# Altium PCB 595数码管显示.PcbDoc
Units mm, origin at the board's own origin, x right, y up, seen from the top; angles counter-clockwise.
Board outline 152.4 x 101.6 mm, 2 copper layers (Top Layer, Bottom Layer); 31 components, 48 nets, 181 pads, 0 vias.
Unrouted connection lines stored in the file: 2.
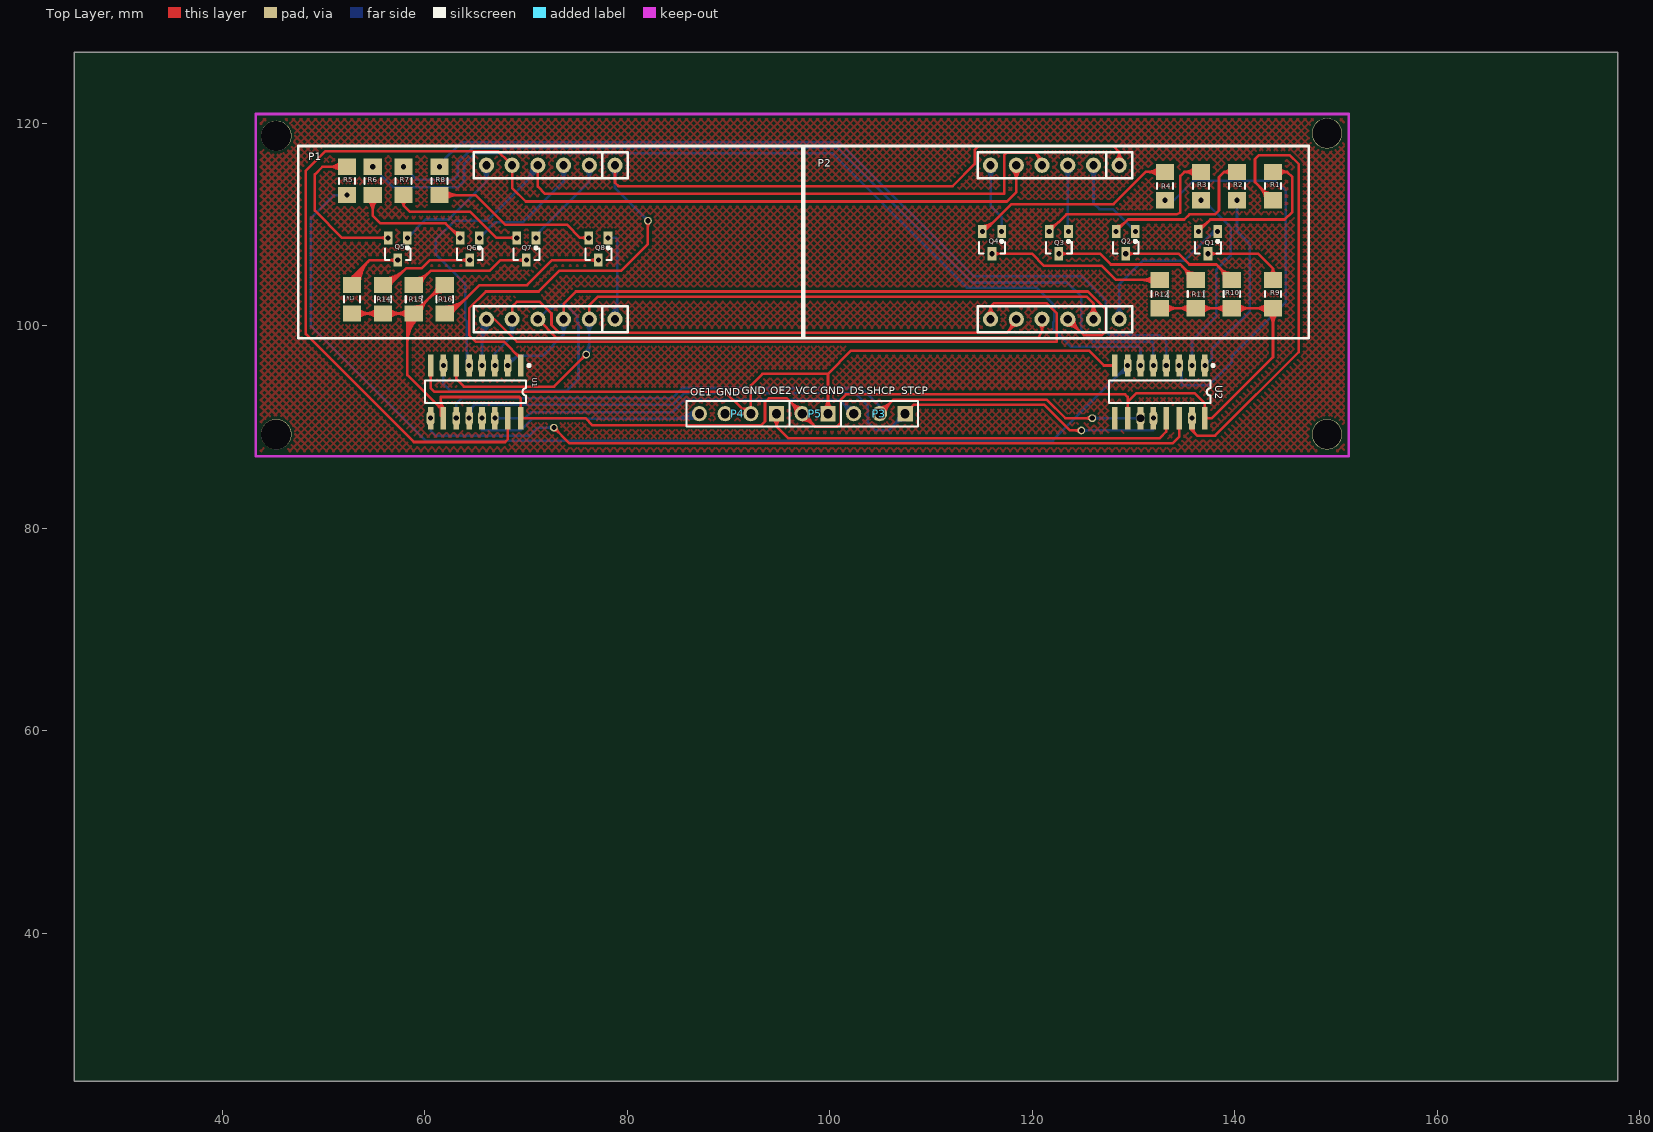
[diagram p0: Top Layer view]
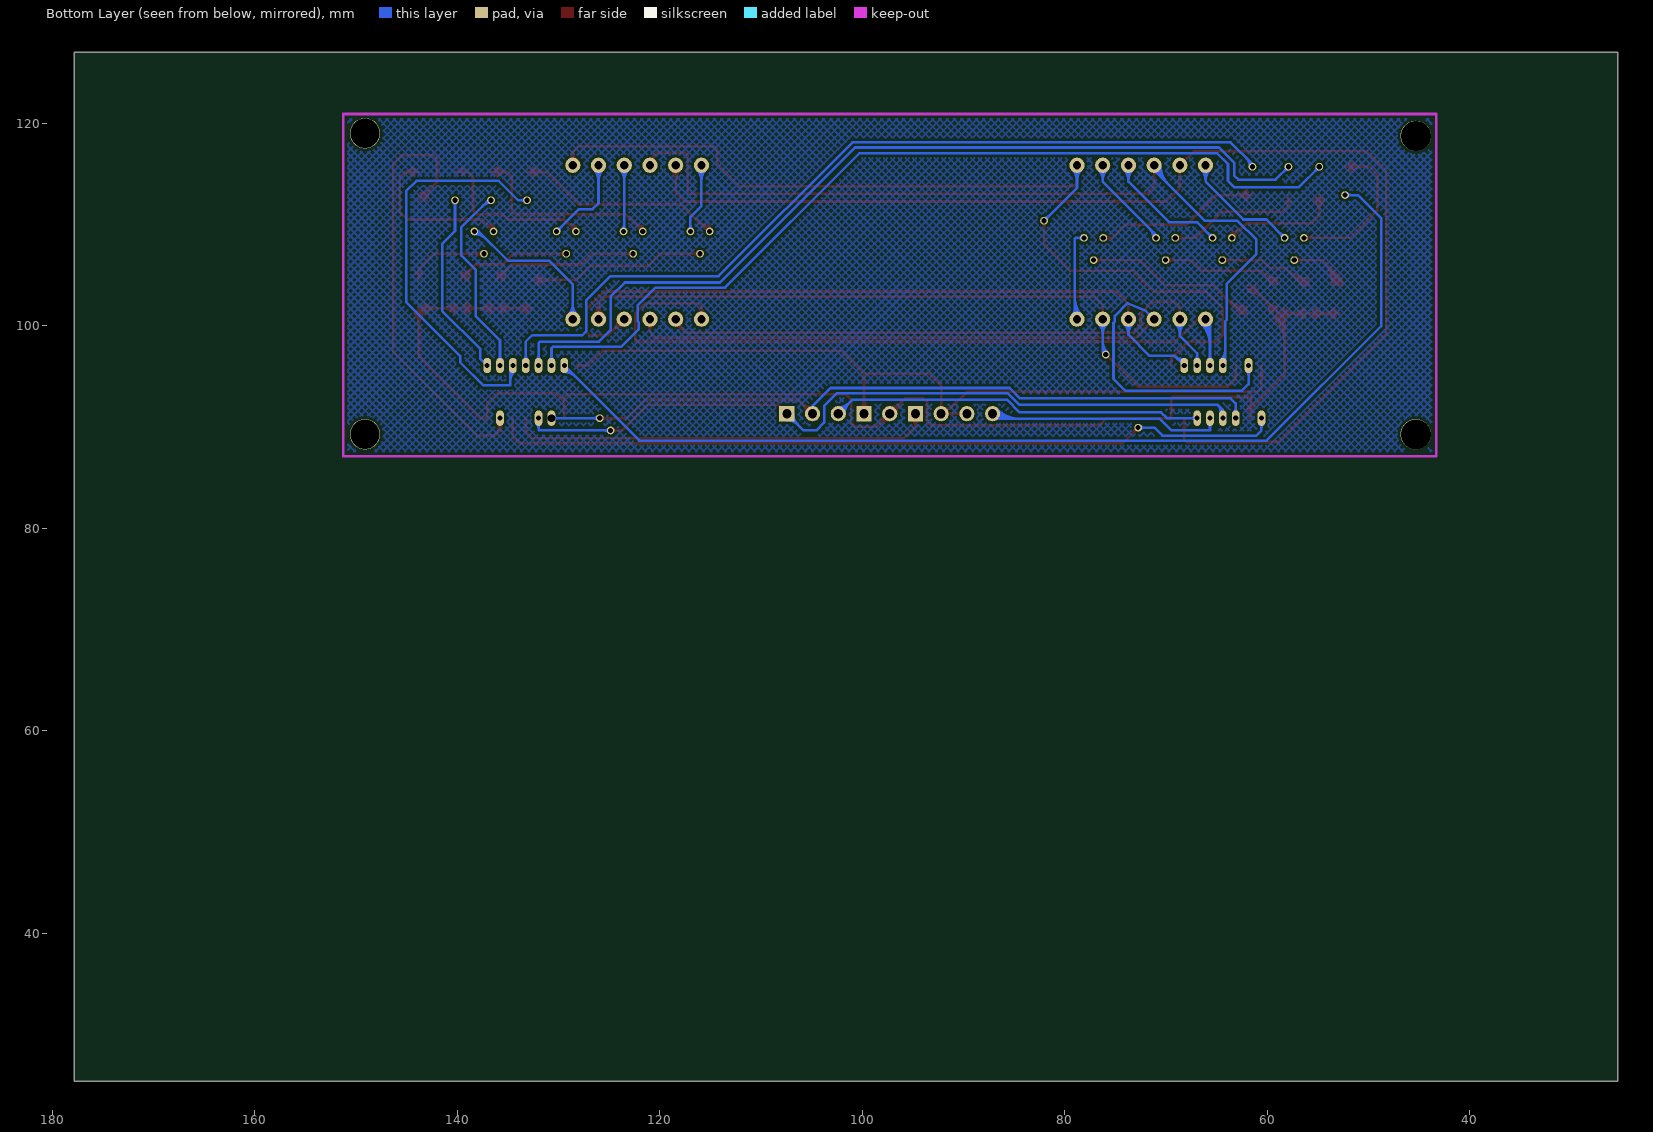
[diagram p1: Bottom Layer view, seen from below]

## Layer stack, top to bottom
Top Layer: signal copper 0.0356
Dielectric: dielectric 0.32, FR-4, Dk 4.8
Bottom Layer: signal copper 0.0356

## Board outline
25.4,25.4 177.8,25.4 177.8,127 25.4,127

## Design rules (kind name [scope] priority, off if disabled: settings)
Clearance [All] p1: gap=0.254
ComponentClearance [All] p1: gap=0.254 collisioncheckmode=3 verticalgap=0.254
PolygonConnect [All] p1: connectstyle=Relief reliefconductorwidth=0.254 reliefentries=4 polygonreliefangle="90 Angle"
RoomDefinition Sheet1 [InComponentClass('Sheet1')] p1: confinementstyle=ConfineIn formatcopy=TRUE lockcomponents=FALSE outline 0,0 50.8,0 50.8,25.4 0,25.4
RoutingVias [All] p1: holewidth=0.711 width=1.27 viastyle="Through Hole" minholewidth=0.711 minwidth=1.27 maxholewidth=0.711 maxwidth=1.27
SolderMaskExpansion [All] p1: expansion=0.102
TestPointUsage [All] p1: valid=0 allowmultiple=FALSE
Testpoint [All] p1: side=15 testpointundercomponent=TRUE minsize=1.016 maxsize=2.54 preferedsize=1.524 minholesize=0 maxholesize=1.016 preferedholesize=0.813 testpointgrid=0.025 style=1023 order=0-112345678
Width [All] p1: maxlimit=0.254 minlimit=0.254 preferedwidth=0.254
18 further rules are at their usual default settings.

## Components (designator, comment, footprint, x,y, rotation, side; value= is the part's Value field where it differs from the comment)
P1 "Header 6X2H" LED-BSR-4 75.184,100.076 r0 top
P2 "Header 6X2H" LED-BSR-4 124.968,100.076 r0 top
P3 "Header 3" HDR1X3 107.442,91.313 r180 top
P4 "Header 4" HDR1X4 94.742,91.313 r180 top
P5 "Header 2" HDR1X2 99.822,91.313 r180 top
Q1 "2N3904" SO-G3 136.398,108.331 r180 top
Q2 "2N3904" SO-G3 128.27,108.331 r180 top
Q3 "2N3904" SO-G3 121.666,108.331 r180 top
Q4 "2N3904" SO-G3 115.062,108.331 r180 top
Q5 "2N3904" SO-G3 56.388,107.696 r180 top
Q6 "2N3904" SO-G3 63.5,107.696 r180 top
Q7 "2N3904" SO-G3 69.088,107.696 r180 top
Q8 "2N3904" SO-G3 76.2,107.696 r180 top
R1 "Res3" 3216[1206] 143.764,113.792 r270 top
R2 "Res3" 3216[1206] 140.208,113.792 r270 top
R3 "Res3" 3216[1206] 136.652,113.792 r270 top
R4 "Res3" 3216[1206] 133.096,113.792 r270 top
R5 "Res3" 3216[1206] 52.324,114.3 r270 top
R6 "Res3" 3216[1206] 54.864,114.3 r90 top
R7 "Res3" 3216[1206] 57.912,114.3 r90 top
R8 "Res3" 3216[1206] 61.468,114.3 r90 top
R9 "Res3" 3216[1206] 143.764,103.124 r90 top
R10 "Res3" 3216[1206] 139.7,103.124 r90 top
R11 "Res3" 3216[1206] 136.144,103.124 r90 top
R12 "Res3" 3216[1206] 132.588,103.124 r90 top
R13 "Res3" 3216[1206] 52.832,102.616 r90 top
R14 "Res3" 3216[1206] 55.88,102.616 r90 top
R15 "Res3" 3216[1206] 58.928,102.616 r90 top
R16 "Res3" 3216[1206] 61.976,102.616 r270 top
U1 "M74HC595M1R" SO16 65.024,93.472 r180 top
U2 "M74HC595M1R" SO16 132.588,93.472 r180 top

## Footprints (in the part's own frame and the unit in brackets; to place one, negate y for a bottom-side part, rotate by r counter-clockwise, add the part's x,y. Pads: shape width x height; smd on the part's side, far side on the other; paste and mask are expansions set on the pad)
3216[1206] [mm] "Chip Resistor; Body 3.2 x 1.6 mm (LxW typ)"
  rect 1.6x1.8 smd: 1(-1.4,0) 2(1.4,0)
  silkscreen extent -0.3,-0.8 0.3,0.8
HDR1X2 [mm] "Connector; Header; 2 Position"
  rect 1.5x1.5 hole 0.9: 1(0,0)
  round 1.5 hole 0.9: 2(2.54,0)
  silkscreen extent -1.27,-1.27 3.81,1.27
HDR1X3 [mm] "Connector; Header; 3 Position"
  rect 1.5x1.5 hole 0.9: 1(0,0)
  round 1.5 hole 0.9: 2(2.54,0) 3(5.08,0)
  silkscreen extent -1.27,-1.27 6.35,1.27
HDR1X4 [mm] "Connector; Header; 4 Position"
  rect 1.5x1.5 hole 0.9: 1(0,0)
  round 1.5 hole 0.9: 2(2.54,0) 3(5.08,0) 4(7.62,0)
  silkscreen extent -1.27,-1.27 8.89,1.27
LED-BSR-4 [mm]
  round 1.5 hole 0.813: A(-6.551,15.769) B(3.609,15.769) C(-1.471,0.569) COM1(-9.091,15.769) COM2(-1.471,15.769) COM3(1.069,15.769) COM4(3.609,0.569) D(-6.551,0.569) DP(-4.011,0.569) E(-9.091,0.569) F(-4.011,15.769) G(1.069,0.569)
  silkscreen extent -27.69,-1.33 22.31,17.67
SO16 [mm] "Small Outline; 16 Leads; Body Width 3.9 mm; Pitch 1.27 mm"
  rect 0.55x2.2 smd: 1(-4.445,-2.6) 2(-3.175,-2.6) 3(-1.905,-2.6) 4(-0.635,-2.6) 5(0.635,-2.6) 6(1.905,-2.6) 7(3.175,-2.6) 8(4.445,-2.6) 9(4.445,2.6) 10(3.175,2.6) 11(1.905,2.6) 12(0.635,2.6) 13(-0.635,2.6) 14(-1.905,2.6) 15(-3.175,2.6) 16(-4.445,2.6)
  silkscreen extent -5.4,-2.72 5,1.1
SO-G3 [mm] "SOT-23; 3 Leads; Body 3.0 x 2.6 mm, inc. leads (LxW max)"
  rect 0.85x1.3 smd: 1(-1.9,-0.983) 2(0,-0.983) 3(-0.95,1.217)
  silkscreen extent -2.23,-0.12 0.32,1.22

## Part data
P1 P2: "Header, 6-Pin, Dual row, Right Angle"
P3: "Header, 3-Pin"
P4: "Header, 4-Pin"
P5: "Header, 2-Pin"
Q1 Q2 Q3 Q4 Q5 Q6 Q7 Q8: "NPN General Purpose Amplifier"
R1 R2 R3 R4 R5 R6 R7 R8 R9 R10 R11 R12 R13 R14 R15 R16: "Resistor"
U1 U2: "8 Bit Shift Register with Output Latches (3 STATE)"

## Free pads (board coordinates)
  round 0.762 hole 0.508: 7(78.1,108.679) 8(76.2,108.679) 9(77.15,106.479) 10(70.988,108.679) 11(69.088,108.679) 12(65.4,108.679) 13(63.5,108.679) 14(70.038,106.479) 15(64.45,106.479) 16(56.388,108.679) 17(58.288,108.679) 18(57.338,106.479) 19(138.298,109.314) 20(137.348,107.114) 21(129.22,107.114) 22(123.566,109.314) 23(121.666,109.314) 24(122.616,107.114) 25(136.398,109.314) 26(130.17,109.314) 27(128.27,109.314) 28(116.962,109.314) 29(115.062,109.314) 30(116.012,107.114) 32(140.208,112.392) 37(133.096,112.392) 39(136.652,112.392) 40(61.468,115.7) 41(54.864,115.7) 44(57.912,115.7) 47(52.324,112.9) 48(82.042,110.363) 54(75.946,97.155) 55(72.75,89.937) 65(124.841,89.662)
  oval 0.762x1.524 hole 0.508: 31(137.033,96.072) 33(131.953,96.072) 34(133.223,96.072) 35(130.683,96.072) 36(129.413,96.072) 38(135.763,90.872) 45(134.493,96.072) 46(135.763,96.072) 49(68.199,96.072) 50(66.929,96.072) 51(65.659,96.072) 52(64.389,96.072) 53(61.849,96.072) 56(60.579,90.872) 57(65.659,90.872) 59(66.929,90.872) 60(63.119,90.872) 61(64.389,90.872) 64(131.953,90.872)
  round 0.762 hole 0.508 paste+0: 58(125.917,90.872)
  oval 0.762x1.524 hole 0.762: 63(130.683,90.872)
  round 3 hole 2.962: 68(45.339,118.745) 69(45.339,89.281)
  round 3 hole 2.9: 70(149.098,89.281) 71(149.098,118.999)

## Nets (pads, with @x,y where several pads share a name; then routed paths per layer and width w, separated by ;. In a path a pad name is that pad's centre, name@x,y a point inside that pad or via, vN(x,y) a via of type N, cw(c..) or ccw(c..) an arc to the next point about the centre after c; other vN are vias at no path point)
GND: P4.2 P4.3 P5.1 U1.8 U2.8 | length 83.3
  Top Layer w0.254: U1.8@60.474,95.142 cw(c60.222,94.89) 60.579,94.89 cw(c60.936,94.89) U1.8@60.684,95.142 ; U1.8 60.579,93.853 60.96,93.472 89.662,93.472 91.313,91.821 P4.2@91.694,91.821 ; P4.2@92.202,91.821 92.202,94.107 93.345,95.25 99.822,95.25 ; P5.1@99.381,91.754 ccw(c98.318,92.817) 99.822,92.817 ccw(c101.326,92.817) P5.1@100.263,91.754 ; P5.1@99.561,91.574 ccw(c98.931,92.204) 99.822,92.204 ccw(c100.713,92.204) P5.1@100.083,91.574 ; P5.1 99.822,95.25 ; U2.8@128.038,95.967 ccw(c127.786,95.715) 127.786,96.072 ccw(c127.786,96.429) U2.8@128.038,96.177 ; U2.8 127.067,96.072 125.603,97.536 102.108,97.536 99.822,95.25
NetP1_1: P2.COM1 pad.28 Q4.1 | length 11.7
  Bottom Layer w0.254: P2.COM1@115.437,115.404 cw(c114.373,114.341) 115.877,114.341 cw(c117.381,114.341) P2.COM1@116.318,115.404 ; P2.COM1@115.616,115.584 cw(c114.986,114.954) 115.877,114.954 cw(c116.768,114.954) P2.COM1@116.138,115.584 ; P2.COM1 115.877,111.834 116.962,110.749 pad.28 ; pad.28@116.783,109.493 ccw(c116.349,109.927) 116.962,109.927 ccw(c117.575,109.927) pad.28@117.142,109.493
NetP1_2: P1.B pad.48 U1.1 | length 45
  Top Layer w0.254: 69.006,97.237 ccw(c69.469,97.699) U1.1@69.469,97.045 ; U1.1 69.469,96.774 67.818,98.425 65.024,98.425 64.389,99.06 64.389,101.727 66.04,103.378 71.247,103.378 73.279,105.41 79.375,105.41 82.042,108.077 pad.48 ; pad.48@81.862,110.183 cw(c81.429,109.75) 82.042,109.75 cw(c82.655,109.75) pad.48@82.222,110.183
  Bottom Layer w0.254: P1.B@78.353,115.404 cw(c77.289,114.341) 78.793,114.341 cw(c80.297,114.341) P1.B@79.234,115.404 ; P1.B@78.532,115.584 cw(c77.902,114.954) 78.793,114.954 cw(c79.684,114.954) P1.B@79.054,115.584 ; P1.B 78.793,113.612 pad.48 ; pad.48@81.788,110.363 ccw(c81.175,110.363) 81.608,110.797 ccw(c82.042,111.23) pad.48@82.042,110.617
NetP1_3: P1.G pad.54 U1.6 | length 26.8
  Top Layer w0.254: U1.6@63.014,95.142 cw(c62.762,94.89) 63.119,94.89 cw(c63.476,94.89) U1.6@63.224,95.142 ; U1.6 63.119,94.742 63.881,93.98 72.771,93.98 pad.54 ; pad.54@75.692,97.155 cw(c75.079,97.155) 75.512,96.721 cw(c75.946,96.288) pad.54@75.946,96.901
  Bottom Layer w0.254: pad.54@75.766,97.335 ccw(c74.591,98.51) 76.253,98.51 ; P1.G@75.813,100.204 cw(c74.749,99.141) 76.253,99.141 cw(c77.757,99.141) P1.G@76.694,100.204 ; P1.G@75.992,100.384 cw(c75.362,99.754) 76.253,99.754 cw(c77.144,99.754) P1.G@76.514,100.384 ; 76.253,97.897 cw(c75.204,97.897) pad.54 76.253,97.462 P1.G
NetP1_4: P2.COM2 pad.22 Q3.1 | length 11.4
  Top Layer w0.254: Q3.1@123.497,109.383 Q3.1
  Bottom Layer w0.254: P2.COM2@123.057,115.404 cw(c121.993,114.341) 123.497,114.341 cw(c125.001,114.341) P2.COM2@123.938,115.404 ; P2.COM2@123.236,115.584 cw(c122.606,114.954) 123.497,114.954 cw(c124.388,114.954) P2.COM2@123.758,115.584 ; pad.22@123.387,109.493 ccw(c123.12,109.76) 123.497,109.76 ; 123.497,110.094 ccw(c124.346,110.094) pad.22@123.746,109.493 ; P2.COM2 123.497,109.383 pad.22
NetP1_5: P1.C pad.49 U1.2 | length 13.7
  Bottom Layer w0.254: pad.49 69.155,97.028 ; pad.49@68.199,96.453 ccw(c68.281,97.159) 68.783,96.656 ; pad.49@68.228,96.705 ccw(c68.358,97.825) 69.155,97.028 ; P1.C@73.273,100.204 cw(c72.209,99.141) 73.713,99.141 cw(c75.217,99.141) P1.C@74.154,100.204 ; P1.C@73.452,100.384 cw(c72.822,99.754) 73.713,99.754 cw(c74.604,99.754) P1.C@73.974,100.384 ; P1.C 73.713,99.113 71.628,97.028 69.155,97.028
NetP1_6: P2.COM3 pad.26 Q2.1 | length 13.8
  Bottom Layer w0.254: P2.COM3@125.597,115.404 cw(c124.533,114.341) 126.037,114.341 cw(c127.541,114.341) P2.COM3@126.478,115.404 ; P2.COM3@125.776,115.584 cw(c125.146,114.954) 126.037,114.954 cw(c126.928,114.954) P2.COM3@126.298,115.584 ; P2.COM3 126.037,112.088 126.619,111.506 127.978,111.506 pad.26 ; pad.26@129.916,109.314 ccw(c129.303,109.314) 129.737,109.747 ccw(c130.17,110.181) pad.26@130.17,109.568
NetP1_7: P1.DP pad.53 U1.7 | length 28
  Bottom Layer w0.254: pad.53@61.669,95.511 cw(c61.236,95.078) 61.849,95.078 cw(c62.462,95.078) pad.53@62.029,95.511 ; pad.53 61.849,94.234 62.484,93.599 74.041,93.599 75.184,94.742 75.184,100.276 75.057,100.403 75.057,100.965 73.8,102.222 72.009,101.481 P1.DP
NetP1_8: P1.F pad.52 U1.5 | length 33.9
  Bottom Layer w0.254: 64.135,97.066 ccw(c65.002,97.066) pad.52@64.389,96.453 ; 64.135,97.679 ccw(c65.615,97.679) pad.52@64.569,96.633 ; pad.52@64.195,96.266 64.135,96.326 64.135,100.457 64.008,100.584 64.008,104.14 61.087,107.061 61.087,108.502 62.948,110.363 66.167,110.363 71.173,115.369 P1.F ; 69.773,113.969 ccw(c67.897,115.845) P1.F@70.55,115.845 ; 70.207,114.403 ccw(c68.765,115.845) P1.F@70.804,115.845 ; 70.64,114.836 ccw(c69.632,115.845) P1.F@71.058,115.845 ; 70.922,115.118 cw(c71.173,114.867) P1.F@71.173,115.222
NetP1_9: P1.D pad.50 U1.3 | length 10
  Bottom Layer w0.254: pad.50@66.749,96.633 ccw(c66.316,97.066) 66.929,97.066 ccw(c67.542,97.066) pad.50@67.109,96.633 ; pad.50 66.929,97.282 68.633,98.986 P1.D ; P1.D@68.193,100.204 cw(c67.129,99.141) 68.633,99.141 cw(c70.137,99.141) P1.D@69.074,100.204 ; P1.D@68.372,100.384 cw(c67.742,99.754) 68.633,99.754 cw(c69.524,99.754) P1.D@68.894,100.384
NetP1_10: P1.A U1.15 | length 64.5
  Top Layer w0.254: U1.15@68.094,89.942 cw(c67.842,89.69) 68.199,89.69 cw(c68.556,89.69) U1.15@68.304,89.942 ; U1.15 68.199,88.773 67.945,88.519 58.928,88.519 48.26,99.187 48.26,115.316 50.165,117.221 67.257,117.221 P1.A@68.274,116.204
NetP1_11: P1.E pad.51 U1.4 | length 12.2
  Bottom Layer w0.254: pad.51@65.479,96.633 ccw(c65.046,97.066) 65.659,97.066 ccw(c66.272,97.066) pad.51@65.839,96.633 ; pad.51 65.659,100.211 P1.E ; 65.659,98.093 cw(c68.646,98.093) P1.E@66.534,100.204 ; 65.659,98.706 cw(c68.032,98.706) P1.E@66.354,100.384 ; 65.659,99.319 cw(c67.419,99.319) P1.E@66.175,100.564 ; 65.659,99.932 cw(c66.806,99.932) P1.E@65.995,100.743
NetP1_12: P2.COM4 pad.19 Q1.1 | length 21.1
  Bottom Layer w0.254: P2.COM4@128.137,101.086 ccw(c127.073,102.149) 128.577,102.149 ccw(c130.081,102.149) P2.COM4@129.018,101.086 ; P2.COM4@128.316,100.906 ccw(c127.686,101.536) 128.577,101.536 ccw(c129.468,101.536) P2.COM4@128.838,100.906 ; P2.COM4 128.577,104.066 130.937,106.426 135.001,106.426 137.889,109.314 pad.19 ccw(c138.298,108.326) 137.599,109.024 ; 137.166,108.591 cw(c138.298,107.458) pad.19@138.298,109.06
NetP2_1: P1.COM4 pad.7 Q8.1 | length 14.3
  Bottom Layer w0.254: pad.7 78.9,108.679 78.994,108.585 78.994,100.846 P1.COM4 ; pad.7@78.28,108.499 cw(c78.713,108.066) 78.713,108.679 cw(c78.713,109.292) pad.7@78.28,108.858 ; P1.COM4@78.353,101.086 ccw(c76.804,102.634) 78.994,102.634 ; P1.COM4@78.532,100.906 ccw(c77.418,102.021) 78.994,102.021 ; P1.COM4@78.712,100.726 ccw(c78.031,101.407) 78.994,101.407 ; 78.994,101.664 ccw(c79.813,101.664) P1.COM4@79.234,101.086
NetP2_4: P1.COM3 pad.10 Q7.1 | length 14.7
  Bottom Layer w0.254: 71.188,109.161 ccw(c71.67,108.679) pad.10 70.988,108.961 76.253,114.226 P1.COM3 ; pad.10@71.242,108.679 cw(c72.537,108.679) 71.621,109.594 ; P1.COM3@75.813,115.404 cw(c74.749,114.341) 76.253,114.341 cw(c77.757,114.341) P1.COM3@76.694,115.404 ; P1.COM3@75.992,115.584 cw(c75.362,114.954) 76.253,114.954 cw(c77.144,114.954) P1.COM3@76.514,115.584
NetP2_6: P1.COM2 pad.12 Q6.1 | length 17
  Bottom Layer w0.254: pad.12 66.957,110.236 69.723,110.236 73.713,114.226 P1.COM2 ; pad.12@65.4,108.933 ccw(c65.4,109.546) 65.834,109.112 ccw(c66.267,108.679) pad.12@65.654,108.679 ; P1.COM2@73.273,115.404 cw(c72.209,114.341) 73.713,114.341 cw(c75.217,114.341) P1.COM2@74.154,115.404 ; P1.COM2@73.452,115.584 cw(c72.822,114.954) 73.713,114.954 cw(c74.604,114.954) P1.COM2@73.974,115.584
NetP2_12: P1.COM1 pad.17 Q5.1 | length 16.4
  Bottom Layer w0.254: pad.17 60.099,110.49 62.357,110.49 66.093,114.226 P1.COM1 ; pad.17@58.288,108.933 ccw(c58.288,109.546) 58.722,109.112 ccw(c59.155,108.679) pad.17@58.542,108.679 ; P1.COM1@65.653,115.404 cw(c64.589,114.341) 66.093,114.341 cw(c67.597,114.341) P1.COM1@66.534,115.404 ; P1.COM1@65.832,115.584 cw(c65.202,114.954) 66.093,114.954 cw(c66.984,114.954) P1.COM1@66.354,115.584
NetP3_1: P3.1 pad.61 pad.64 pad.65 U1.12 U2.12 | length 83.2
  Top Layer w0.254: P3.1 108.331,92.202 121.158,92.202 123.698,89.662 pad.65 ; pad.65@124.661,89.482 ccw(c124.228,89.049) 124.228,89.662 ccw(c124.228,90.275) pad.65@124.661,89.842
  Bottom Layer w0.254: pad.61 64.389,91.694 64.897,92.202 ; pad.61@64.389,91.253 cw(c65.046,91.399) 64.57,91.875 ; pad.61@64.637,91.308 cw(c65.581,91.518) 64.897,92.202 ; P3.1@106.819,91.313 cw(c105.315,91.313) 106.378,90.249 cw(c107.442,89.186) P3.1@107.442,90.69 ; P3.1@107.073,91.313 cw(c106.182,91.313) 106.812,90.683 cw(c107.442,90.053) P3.1@107.442,90.944 ; P3.1 105.791,89.662 104.521,89.662 103.759,90.424 103.759,92.075 102.489,93.345 85.642,93.345 84.499,92.202 64.897,92.202 ; pad.65 131.953,89.662 pad.64 ; pad.65@125.021,89.482 cw(c125.454,89.049) 125.454,89.662 cw(c125.454,90.275) pad.65@125.021,89.842 ; pad.64@131.773,90.311 cw(c131.34,89.878) 131.953,89.878 cw(c132.566,89.878) pad.64@132.133,90.311
NetP3_2: P3.2 pad.58 pad.60 pad.63 U1.11 U2.11 | length 80.1
  Top Layer w0.254: P3.2 106.299,92.71 121.412,92.71 123.25,90.872 pad.58 ; P3.2@104.902,91.682 ccw(c104.902,92.573) 105.532,91.943 ccw(c106.162,91.313) P3.2@105.271,91.313 ; P3.2@104.902,91.936 ccw(c104.902,93.44) 105.966,92.377 ccw(c107.029,91.313) P3.2@105.525,91.313 ; pad.58@125.737,90.692 ccw(c125.304,90.259) 125.304,90.872 ccw(c125.304,91.485) pad.58@125.737,91.052
  Bottom Layer w0.254: pad.60@62.939,91.433 ccw(c62.506,91.866) 63.119,91.866 ccw(c63.732,91.866) pad.60@63.299,91.433 ; pad.60 63.119,92.329 63.627,92.837 84.415,92.837 85.431,93.853 103.124,93.853 104.902,92.075 P3.2 ; pad.58 pad.63 ; pad.58@126.097,90.692 cw(c126.53,90.259) 126.53,90.872 cw(c126.53,91.485) pad.58@126.097,91.052 ; pad.63@130.503,90.692 ccw(c130.07,90.259) 130.07,90.872 ccw(c130.07,91.485) pad.63@130.503,91.052
NetP3_3: P3.3 pad.59 U1.14 | length 41.5
  Bottom Layer w0.254: pad.59 69.917,90.872 70.485,91.44 84.455,91.44 85.725,92.71 100.965,92.71 P3.3 ; pad.59@67.109,90.692 cw(c67.542,90.259) 67.542,90.872 cw(c67.542,91.485) pad.59@67.109,91.052 ; P3.3@101.739,91.313 ccw(c100.235,91.313) 101.298,92.377 ccw(c102.362,93.44) P3.3@102.362,91.936 ; P3.3@101.993,91.313 ccw(c101.102,91.313) 101.732,91.943 ccw(c102.362,92.573) P3.3@102.362,91.682
NetP4_1: P4.1 U2.13 | length 45.2
  Top Layer w0.254: P4.1@94.361,90.82 cw(c93.759,90.043) 94.742,90.043 ; P4.1@94.516,91.021 cw(c94.16,90.561) 94.742,90.561 cw(c95.324,90.561) P4.1@94.968,91.021 ; P4.1 94.742,90.043 ; P4.1@95.123,90.82 ccw(c95.725,90.043) 94.742,90.043 ; U2.13@133.118,89.942 cw(c132.866,89.69) 133.223,89.69 cw(c133.58,89.69) U2.13@133.328,89.942 ; U2.13 133.223,89.535 132.588,88.9 95.885,88.9 94.742,90.043
NetP4_4: P4.4 pad.57 U1.13 | length 31.6
  Bottom Layer w0.254: pad.57@65.479,90.311 cw(c65.046,89.878) 65.659,89.878 cw(c66.272,89.878) pad.57@65.839,90.311 ; pad.57 65.659,89.662 69.469,89.662 70.612,90.805 86.614,90.805 P4.4 ; 84.392,90.805 ccw(c84.392,94.043) P4.4@86.681,91.754 ; 85.005,90.805 ccw(c85.005,93.43) P4.4@86.861,91.574 ; 85.618,90.805 ccw(c85.618,92.817) P4.4@87.041,91.394 ; 86.231,90.805 ccw(c86.231,92.204) P4.4@87.22,91.215
NetQ1_2: pad.25 Q1.2 R1.1 | length 20.9
  Top Layer w0.254: Q1.2 137.574,110.49 144.907,110.49 145.669,111.252 145.669,114.681 145.158,115.192 ; Q1.2@136.398,109.568 ccw(c136.398,110.181) 136.832,109.747 ccw(c137.265,109.314) Q1.2@136.652,109.314 ; Q1.2@136.398,109.583 ccw(c136.398,110.232) 136.857,109.773 ; Q1.2@136.398,109.837 ccw(c136.398,111.099) 137.291,110.207 ; R1.1 145.158,115.192 ; R1.1@144.207,114.951 cw(c144.67,114.627) 144.67,115.192 cw(c144.67,115.757) R1.1@144.207,115.433 ; R1.1@144.415,114.806 cw(c145.158,114.285) 145.158,115.192 ; R1.1@144.415,115.578 ccw(c145.158,116.099) 145.158,115.192
NetQ1_3: pad.20 Q1.3 R9.2 | length 11.5
  Top Layer w0.254: Q1.3 142.293,107.114 143.764,105.643 ; Q1.3@137.528,106.934 cw(c137.961,106.501) 137.961,107.114 cw(c137.961,107.727) Q1.3@137.528,107.293 ; Q1.3@137.559,106.903 cw(c138.068,106.394) 138.068,107.114 cw(c138.068,107.833) Q1.3@137.559,107.325 ; R9.2@143.449,105.119 ccw(c143.171,105.643) 143.764,105.643 ; R9.2 143.764,105.643 ; R9.2@144.079,105.119 cw(c144.357,105.643) 143.764,105.643
NetQ2_2: pad.27 Q2.2 R2.1 | length 20.2
  Top Layer w0.254: Q2.2 129.446,110.49 135.001,110.49 135.509,110.998 138.049,110.998 138.43,111.379 138.43,114.681 138.941,115.192 ; Q2.2@128.27,109.568 ccw(c128.27,110.181) 128.704,109.747 ccw(c129.137,109.314) Q2.2@128.524,109.314 ; Q2.2@128.27,109.583 ccw(c128.27,110.232) 128.729,109.773 ; Q2.2@128.27,109.837 ccw(c128.27,111.099) 129.163,110.207 ; R2.1@139.525,114.855 ccw(c138.941,114.517) 138.941,115.192 ; R2.1@139.525,115.529 cw(c138.941,115.867) 138.941,115.192 ; R2.1 138.941,115.192
NetQ2_3: pad.21 Q2.3 R10.2 | length 17.8
  Top Layer w0.254: Q2.3 134.44,107.114 135.509,106.045 138.179,106.045 R10.2 ; Q2.3@129.4,106.934 cw(c129.833,106.501) 129.833,107.114 cw(c129.833,107.727) Q2.3@129.4,107.293 ; Q2.3@129.431,106.903 cw(c129.94,106.394) 129.94,107.114 cw(c129.94,107.833) Q2.3@129.431,107.325 ; 138.38,105.844 cw(c137.061,104.524) R10.2@138.927,104.524 ; 138.622,105.602 ccw(c139.6,106.58) R10.2@139.6,105.197 ; 138.814,105.41 cw(c137.928,104.524) R10.2@139.181,104.524 ; R10.2@139.055,105.169 ccw(c139.6,105.713) R10.2@139.6,104.943
NetQ3_2: pad.23 Q3.2 R3.1 | length 25.8
  Top Layer w0.254: Q3.2 123.35,110.998 134.239,110.998 134.62,111.156 134.62,114.808 135.004,115.192 ; Q3.2@121.666,109.568 ccw(c121.666,110.181) 122.1,109.747 ccw(c122.533,109.314) Q3.2@121.92,109.314 ; Q3.2@121.666,109.583 ccw(c121.666,110.232) 122.125,109.773 ; Q3.2@121.666,109.837 ccw(c121.666,111.099) 122.559,110.207 ; R3.1@136.06,114.733 ccw(c135.004,113.748) 135.004,115.192 ; R3.1@136.06,115.651 cw(c135.004,116.636) 135.004,115.192 ; R3.1@136.246,114.906 ccw(c135.588,114.293) 135.588,115.192 ccw(c135.588,116.091) R3.1@136.246,115.478 ; R3.1 135.004,115.192
NetQ3_3: pad.24 Q3.3 R11.2 | length 20.8
  Top Layer w0.254: Q3.3 126.693,107.114 127.762,106.045 134.623,106.045 R11.2 ; Q3.3@122.796,106.934 cw(c123.229,106.501) 123.229,107.114 cw(c123.229,107.727) Q3.3@122.796,107.293 ; Q3.3@122.827,106.903 cw(c123.336,106.394) 123.336,107.114 cw(c123.336,107.833) Q3.3@122.827,107.325 ; 134.824,105.844 cw(c133.505,104.524) R11.2@135.371,104.524 ; 135.066,105.602 ccw(c136.044,106.58) R11.2@136.044,105.197 ; 135.258,105.41 cw(c134.372,104.524) R11.2@135.625,104.524 ; R11.2@135.499,105.169 ccw(c136.044,105.713) R11.2@136.044,104.943
NetQ4_2: pad.29 Q4.2 R4.1 | length 27.4
  Top Layer w0.254: Q4.2@115.062,109.568 ccw(c115.062,110.609) 115.798,109.873 ; Q4.2@115.062,109.583 ccw(c115.062,110.66) 115.824,109.898 ; Q4.2@115.062,109.837 ccw(c115.062,111.527) 116.257,110.332 ; Q4.2@115.239,109.314 117.939,112.014 128.016,112.014 131.194,115.192 R4.1 ; R4.1@132.52,114.716 ccw(c131.371,113.567) 131.371,115.192 ccw(c131.371,116.817) R4.1@132.52,115.668 ; R4.1@132.7,114.896 ccw(c131.984,114.18) 131.984,115.192 ccw(c131.984,116.204) R4.1@132.7,115.488
NetQ4_3: pad.30 Q4.3 R12.2 | length 23.9
  Top Layer w0.254: Q4.3 119.962,107.114 121.158,105.918 126.873,105.918 128.267,104.524 R12.2 ; Q4.3@116.192,106.934 cw(c116.625,106.501) 116.625,107.114 cw(c116.625,107.727) Q4.3@116.192,107.293 ; Q4.3@116.223,106.903 cw(c116.732,106.394) 116.732,107.114 cw(c116.732,107.833) Q4.3@116.223,107.325 ; R12.2@132.012,104.048 ccw(c130.863,102.899) 130.863,104.524 ccw(c130.863,106.149) R12.2@132.012,105 ; R12.2@132.192,104.228 ccw(c131.476,103.512) 131.476,104.524 ccw(c131.476,105.536) R12.2@132.192,104.82
NetQ5_2: pad.16 Q5.2 R5.1 | length 21.6
  Top Layer w0.254: R5.1@51.748,115.224 ccw(c50.599,114.075) 50.599,115.7 ccw(c50.599,117.325) R5.1@51.748,116.176 ; R5.1@51.928,115.404 ccw(c51.212,114.688) 51.212,115.7 ccw(c51.212,116.712) R5.1@51.928,115.996 ; R5.1 49.908,115.7 49.149,114.941 49.149,111.379 51.849,108.679 Q5.2 ; Q5.2@56.177,108.468 ccw(c55.669,107.959) 55.669,108.679 ccw(c55.669,109.398) Q5.2@56.177,108.89 ; Q5.2@56.209,108.499 ccw(c55.775,108.066) 55.775,108.679 ccw(c55.775,109.292) Q5.2@56.209,108.858
NetQ5_3: pad.18 Q5.3 R13.2 | length 17.2
  Top Layer w0.254: R13.2@52.589,103.998 cw(c53.73,104.058) 52.922,104.865 ; R13.2 52.832,104.775 54.536,106.479 ; R13.2@52.843,104.011 cw(c54.496,104.098) 53.326,105.269 ; R13.2@53.097,104.025 cw(c55.263,104.138) 53.729,105.672 ; R13.2@53.35,104.038 cw(c56.029,104.179) 54.132,106.075 ; R13.2@53.604,104.051 cw(c56.796,104.219) 54.536,106.479 ; Q5.3@57.127,106.268 ccw(c56.619,105.759) 56.619,106.479 ccw(c56.619,107.198) Q5.3@57.127,106.69 ; Q5.3@57.159,106.299 ccw(c56.725,105.866) 56.725,106.479 ccw(c56.725,107.092) Q5.3@57.159,106.658 ; Q5.3 54.536,106.479
NetQ6_2: pad.13 Q6.2 R6.1 | length 18.2
  Top Layer w0.254: R6.1@54.388,112.424 cw(c53.239,111.275) 54.864,111.275 cw(c56.489,111.275) R6.1@55.34,112.424 ; R6.1@54.568,112.604 cw(c53.852,111.888) 54.864,111.888 cw(c55.876,111.888) R6.1@55.16,112.604 ; R6.1 54.864,110.871 55.626,110.109 62.07,110.109 Q6.2 ; 62.607,109.572 ccw(c63.5,110.464) Q6.2@63.5,109.202 ; 63.041,109.138 ccw(c63.5,109.597) Q6.2@63.5,108.948 ; Q6.2@63.246,108.679 ccw(c62.633,108.679) 63.067,109.112 ccw(c63.5,109.546) Q6.2@63.5,108.933
NetQ6_3: pad.15 Q6.3 R14.2 | length 17.4
  Top Layer w0.254: R14.2 56.518,104.016 58.166,105.664 59.69,105.664 60.505,106.479 Q6.3 ; R14.2@55.98,104.181 ccw(c55.98,105.878) 57.18,104.678 ; R14.2@55.98,104.435 ccw(c55.98,106.745) 57.614,105.112 ; R14.2@55.98,104.689 ccw(c55.98,107.613) 58.047,105.545 ; R14.2@56.653,104.016 cw(c56.979,104.016) R14.2@56.748,104.246 ; Q6.3@64.239,106.268 ccw(c63.731,105.759) 63.731,106.479 ccw(c63.731,107.198) Q6.3@64.239,106.69 ; Q6.3@64.271,106.299 ccw(c63.837,105.866) 63.837,106.479 ccw(c63.837,107.092) Q6.3@64.271,106.658
NetQ7_2: pad.11 Q7.2 R7.1 | length 16.6
  Top Layer w0.254: R7.1@57.651,112.28 cw(c57.486,111.887) 57.912,111.887 ; R7.1 57.912,111.887 ; R7.1@58.173,112.28 ccw(c58.338,111.887) 57.912,111.887 ; Q7.2@68.877,108.468 ccw(c68.369,107.959) 68.369,108.679 ccw(c68.369,109.398) Q7.2@68.877,108.89 ; Q7.2@68.909,108.499 ccw(c68.475,108.066) 68.475,108.679 ccw(c68.475,109.292) Q7.2@68.909,108.858 ; Q7.2 67.089,108.679 64.516,111.252 58.547,111.252 57.912,111.887
NetQ7_3: pad.14 Q7.3 R15.2 | length 17.7
  Top Layer w0.254: R15.2@59.028,104.435 ccw(c59.028,105.826) 60.011,104.842 ; R15.2@59.028,104.689 ccw(c59.028,106.693) 60.445,105.276 ; R15.2@59.052,104.14 59.309,104.14 60.579,105.41 66.421,105.41 67.49,106.479 Q7.3 ; R15.2@59.701,104.016 cw(c60.947,104.016) 60.066,104.897 ; Q7.3@69.827,106.268 ccw(c69.319,105.759) 69.319,106.479 ccw(c69.319,107.198) Q7.3@69.827,106.69 ; Q7.3@69.859,106.299 ccw(c69.425,105.866) 69.425,106.479 ccw(c69.425,107.092) Q7.3@69.859,106.658
NetQ8_2: pad.8 Q8.2 R8.1 | length 22.7
  Top Layer w0.254: R8.1 65.027,112.9 67.945,109.982 74.041,109.982 75.344,108.679 Q8.2 ; R8.1@61.864,112.604 cw(c62.58,111.888) 62.58,112.9 cw(c62.58,113.912) R8.1@61.864,113.196 ; R8.1@62.044,112.424 cw(c63.193,111.275) 63.193,112.9 cw(c63.193,114.525) R8.1@62.044,113.376 ; Q8.2@75.989,108.468 ccw(c75.481,107.959) 75.481,108.679 ccw(c75.481,109.398) Q8.2@75.989,108.89 ; Q8.2@76.021,108.499 ccw(c75.587,108.066) 75.587,108.679 ccw(c75.587,109.292) Q8.2@76.021,108.858
NetQ8_3: pad.9 Q8.3 R16.2 | length 25.1
  Top Layer w0.254: R16.2 62.608,101.216 65.405,104.013 70.104,104.013 72.57,106.479 Q8.3 ; R16.2@62.076,101.381 ccw(c62.076,103.064) 63.266,101.874 ; R16.2@62.076,101.635 ccw(c62.076,103.931) 63.699,102.307 ; R16.2@62.076,101.889 ccw(c62.076,104.798) 64.133,102.741 ; R16.2@62.749,101.216 cw(c63.089,101.216) R16.2@62.849,101.457 ; Q8.3@76.939,106.268 ccw(c76.431,105.759) 76.431,106.479 ccw(c76.431,107.198) Q8.3@76.939,106.69 ; Q8.3@76.971,106.299 ccw(c76.537,105.866) 76.537,106.479 ccw(c76.537,107.092) Q8.3@76.971,106.658
NetR1_2: pad.38 R1.2 U2.15 | length 51
  Top Layer w0.254: U2.15@135.583,90.311 cw(c135.15,89.878) 135.763,89.878 cw(c136.376,89.878) U2.15@135.943,90.311 ; U2.15@135.661,90.076 ccw(c136.077,89.959) 135.771,89.654 ; U2.15 135.763,89.662 136.271,89.154 138.049,89.154 146.304,97.409 146.304,115.951 145.415,116.84 142.367,116.84 141.986,116.459 141.986,114.17 R1.2 ; U2.15@135.906,90.007 ccw(c136.557,89.825) 136.078,89.347 ; 142.444,113.712 cw(c141.125,112.392) R1.2@142.991,112.392 ; 142.686,113.47 ccw(c143.664,114.448) R1.2@143.664,113.065 ; 142.878,113.278 cw(c141.992,112.392) R1.2@143.245,112.392 ; R1.2@143.119,113.037 ccw(c143.664,113.581) R1.2@143.664,112.811 ; 135.763,89.69 ccw(c135.406,89.69) 135.658,89.942 cw(c135.406,89.69) 135.763,89.69 ; 135.763,89.69 cw(c136.12,89.69) 135.868,89.942 ccw(c136.12,89.69) 135.763,89.69
NetR2_2: pad.31 pad.32 R2.2 U2.1 | length 19.7
  Bottom Layer w0.254: pad.31 137.735,96.774 137.735,97.73 141.478,101.473 141.478,108.077 140.208,109.347 pad.32 ; pad.32@140.028,112.212 cw(c139.595,111.779) 140.208,111.779 cw(c140.821,111.779) pad.32@140.388,112.212
NetR3_2: pad.39 pad.46 R3.2 U2.2 | length 21.7
  Bottom Layer w0.254: pad.46@135.583,96.633 ccw(c135.15,97.066) 135.763,97.066 ccw(c136.376,97.066) pad.46@135.943,96.633 ; pad.46 135.763,98.552 138.176,100.965 138.176,105.537 139.573,106.934 139.573,109.728 136.909,112.392 pad.39 cw(c136.652,111.772) 137.091,112.21 ; pad.39@136.652,112.138 cw(c136.652,110.904) 137.524,111.777
NetR4_2: pad.37 pad.45 R4.2 U2.3 | length 43
  Bottom Layer w0.254: pad.37 133.982,112.392 135.89,114.3 144.018,114.3 145.034,113.284 145.034,102.362 139.7,97.028 139.7,96.393 137.414,94.107 134.747,94.107 134.747,95.818 pad.45 ; pad.37@133.276,112.212 cw(c133.709,111.779) 133.709,112.392 cw(c133.709,113.005) pad.37@133.276,112.572 ; pad.45@134.313,95.511 cw(c133.267,94.465) 134.747,94.465 ; pad.45@134.493,95.691 cw(c133.88,95.078) 134.747,95.078
NetR5_2: pad.36 pad.47 R5.2 U2.7 | length 106.5
  Bottom Layer w0.254: pad.47@52.144,112.72 ccw(c51.711,112.287) 51.711,112.9 ccw(c51.711,113.513) pad.47@52.144,113.08 ; pad.47 51.051,112.9 48.768,110.617 48.768,99.949 60.071,88.646 122.047,88.646 122.047,88.706 pad.36 ; 128.329,94.988 cw(c129.413,93.904) pad.36@129.413,95.437 ; 128.763,95.422 cw(c129.413,94.771) pad.36@129.413,95.691
NetR6_2: pad.35 pad.41 R6.2 U2.6 | length 92.2
  Bottom Layer w0.254: pad.41@54.864,115.446 cw(c54.864,114.833) 55.298,115.266 cw(c55.731,115.7) pad.41@55.118,115.7 ; pad.41 56.899,113.665 63.246,113.665 63.881,114.3 63.881,115.951 64.96,117.03 100.266,117.03 113.538,103.759 120.396,103.759 122.174,101.981 122.174,100.47 122.047,100.343 122.047,99.695 123.825,97.917 130.556,97.917 130.683,97.79 pad.35 ; pad.35@130.503,96.633 ccw(c130.07,97.066) 130.683,97.066 ccw(c131.296,97.066) pad.35@130.863,96.633
NetR7_2: pad.33 pad.44 R7.2 U2.5 | length 90.7
  Bottom Layer w0.254: pad.44@57.912,115.446 cw(c57.912,114.833) 58.346,115.266 cw(c58.779,115.7) pad.44@58.166,115.7 ; pad.44 59.185,114.427 62.865,114.427 63.246,114.808 63.246,116.078 64.77,117.602 100.711,117.602 114.046,104.267 123.444,104.267 124.841,102.87 124.841,99.568 125.984,98.425 131.826,98.425 131.953,98.298 pad.33 ; pad.33@131.773,96.633 ccw(c131.34,97.066) 131.953,97.066 ccw(c132.566,97.066) pad.33@132.133,96.633
NetR8_2: pad.34 pad.40 R8.2 U2.4 | length 87.6
  Bottom Layer w0.254: 61.645,116.128 ccw(c62.074,115.7) pad.40 61.468,115.951 63.627,118.11 100.965,118.11 114.173,104.902 124.841,104.902 127.254,102.489 127.254,99.441 127.635,99.06 132.588,99.06 133.223,98.425 pad.34 ; pad.40@61.722,115.7 cw(c62.941,115.7) 62.079,116.562 ; pad.34@133.043,96.633 ccw(c132.61,97.066) 133.223,97.066 ccw(c133.836,97.066) pad.34@133.403,96.633
NetU1_9: pad.55 pad.56 U1.9 U2.14 | length 82
  Top Layer w0.254: pad.55@72.644,90.043 74.295,88.392 133.858,88.392 134.493,89.027 U2.14 ; pad.55@72.75,89.683 cw(c72.75,89.07) 73.184,89.503 cw(c73.617,89.937) pad.55@73.004,89.937 ; U2.14@134.388,89.942 cw(c134.136,89.69) 134.493,89.69 cw(c134.85,89.69) U2.14@134.598,89.942
  Bottom Layer w0.254: pad.56@60.399,90.311 cw(c59.966,89.878) 60.579,89.878 cw(c61.192,89.878) pad.56@60.759,90.311 ; pad.56 60.579,89.662 61.087,89.154 70.358,89.154 71.141,89.937 pad.55 ; pad.55@72.571,89.757 ccw(c72.137,89.324) 72.137,89.937 ccw(c72.137,90.55) pad.55@72.571,90.116
VCC: P5.2 R9.1 R10.1 R11.1 R12.1 R13.1 R14.1 R15.1 R16.1 U1.10 U1.16 U2.10 U2.16 | length 213.8
  Top Layer w0.254: R13.1 R15.1 ; R13.1@53.228,100.92 cw(c53.944,100.204) 53.944,101.216 cw(c53.944,102.228) R13.1@53.228,101.512 ; R13.1@53.408,100.74 cw(c54.557,99.591) 54.557,101.216 cw(c54.557,102.841) R13.1@53.408,101.692 ; R14.1@55.304,100.74 ccw(c54.155,99.591) 54.155,101.216 ccw(c54.155,102.841) R14.1@55.304,101.692 ; R14.1@55.484,100.92 ccw(c54.768,100.204) 54.768,101.216 ccw(c54.768,102.228) R14.1@55.484,101.512 ; R14.1@56.276,100.92 cw(c56.992,100.204) 56.992,101.216 cw(c56.992,102.228) R14.1@56.276,101.512 ; R14.1@56.456,100.74 cw(c57.605,99.591) 57.605,101.216 cw(c57.605,102.841) R14.1@56.456,101.692 ; 58.293,98.3 cw(c61.744,98.3) R15.1@59.304,100.74 ; 58.293,98.913 cw(c61.131,98.913) R15.1@59.124,100.92 ; 58.293,99.526 cw(c60.518,99.526) R15.1@58.945,101.099 ; 58.293,100.139 cw(c59.905,100.139) R15.1@58.765,101.279 ; R15.1@58.352,100.74 ccw(c57.203,99.591) 57.203,101.216 ccw(c57.203,102.841) R15.1@58.352,101.692 ; R15.1@58.532,100.92 ccw(c57.816,100.204) 57.816,101.216 ccw(c57.816,102.228) R15.1@58.532,101.512 ; R15.1@59.028,101.635 ccw(c59.028,102.405) R15.1@59.573,101.861 ; R15.1@59.028,101.889 ccw(c59.028,103.272) 60.006,102.294 ; R15.1@59.447,101.216 cw(c60.7,101.216) 59.814,102.102 ; R15.1@59.701,101.216 cw(c61.567,101.216) 60.248,102.536 ; 60.474,102.762 cw(c61.876,101.361) R16.1@61.876,103.343 ; 60.832,103.12 ccw(c59.936,104.016) R16.1@61.203,104.016 ; 60.908,103.196 cw(c61.876,102.228) R16.1@61.876,103.597 ; 61.374,92.042 ccw(c61.849,92.516) U1.10@61.849,91.845 ; 61.595,92.054 ccw(c62.206,92.054) U1.10@61.774,91.622 ; 61.595,92.668 ccw(c62.82,92.668) U1.10@61.954,91.802 ; U1.10 61.595,91.126 61.595,92.964 69.342,92.964 69.469,92.837 U1.16 75.886,90.872 76.588,90.17 93.218,90.17 93.599,90.551 93.599,92.456 93.98,92.837 95.758,92.837 98.552,90.043 100.711,90.043 101.092,90.424 101.092,92.71 101.6,93.218 129.159,93.218 129.413,92.964 U2.10 ; U1.10@61.849,91.567 58.293,95.123 58.293,100.581 61.728,104.016 R16.1 ; U1.16@69.364,91.802 ccw(c69.112,92.054) 69.469,92.054 ccw(c69.826,92.054) U1.16@69.574,91.802 ; U1.16@69.574,90.767 cw(c69.826,90.515) 69.826,90.872 cw(c69.826,91.229) U1.16@69.574,90.977 ; 89.662,91.313 92.202,91.313 92.202,90.932 ; P5.2@96.659,91.313 ccw(c95.155,91.313) 96.218,92.377 ccw(c97.282,93.44) P5.2@97.282,91.936 ; P5.2@96.913,91.313 ccw(c96.022,91.313) 96.652,91.943 ccw(c97.282,92.573) P5.2@97.282,91.682 ; P5.2@97.282,90.69 cw(c97.282,89.186) 98.346,90.249 cw(c99.409,91.313) P5.2@97.905,91.313 ; P5.2@97.282,90.944 cw(c97.282,90.053) 97.912,90.683 cw(c98.542,91.313) P5.2@97.651,91.313 ; U2.10@129.308,91.802 ccw(c129.056,92.054) 129.413,92.054 ccw(c129.77,92.054) U2.10@129.518,91.802 ; 129.413,92.456 130.302,93.345 136.017,93.345 137.033,92.329 U2.16 137.735,90.872 143.764,96.901 R9.1 R12.1 ; R12.1@132.984,101.428 cw(c133.7,100.712) 133.7,101.724 cw(c133.7,102.736) R12.1@132.984,102.02 ; R12.1@133.164,101.248 cw(c134.313,100.099) 134.313,101.724 cw(c134.313,103.349) R12.1@133.164,102.2 ; R11.1@135.568,101.248 ccw(c134.419,100.099) 134.419,101.724 ccw(c134.419,103.349) R11.1@135.568,102.2 ; R11.1@135.748,101.428 ccw(c135.032,100.712) 135.032,101.724 ccw(c135.032,102.736) R11.1@135.748,102.02 ; R11.1@136.54,101.428 cw(c137.256,100.712) 137.256,101.724 cw(c137.256,102.736) R11.1@136.54,102.02 ; R11.1@136.72,101.248 cw(c137.869,100.099) 137.869,101.724 cw(c137.869,103.349) R11.1@136.72,102.2 ; U2.16@136.928,91.802 ccw(c136.676,92.054) 137.033,92.054 ccw(c137.39,92.054) U2.16@137.138,91.802 ; U2.16@137.138,90.767 cw(c137.39,90.515) 137.39,90.872 cw(c137.39,91.229) U2.16@137.138,90.977 ; R10.1@139.124,101.248 ccw(c137.975,100.099) 137.975,101.724 ccw(c137.975,103.349) R10.1@139.124,102.2 ; R10.1@139.304,101.428 ccw(c138.588,100.712) 138.588,101.724 ccw(c138.588,102.736) R10.1@139.304,102.02 ; R10.1@140.096,101.428 cw(c140.812,100.712) 140.812,101.724 cw(c140.812,102.736) R10.1@140.096,102.02 ; R10.1@140.276,101.248 cw(c141.425,100.099) 141.425,101.724 cw(c141.425,103.349) R10.1@140.276,102.2 ; R9.1@143.188,101.248 ccw(c142.039,100.099) 142.039,101.724 ccw(c142.039,103.349) R9.1@143.188,102.2 ; R9.1@143.288,101.248 cw(c142.139,100.099) 143.764,100.099 cw(c145.389,100.099) R9.1@144.24,101.248 ; R9.1@143.368,101.428 ccw(c142.652,100.712) 142.652,101.724 ccw(c142.652,102.736) R9.1@143.368,102.02 ; R9.1@143.468,101.428 cw(c142.752,100.712) 143.764,100.712 cw(c144.776,100.712) R9.1@144.06,101.428
pads on no net: P2.A P2.B P2.C P2.D P2.DP P2.E P2.F P2.G U2.9
copper on no net: | length 480.8
  Top Layer w0.254: 66.093,100.645 66.868,100.645 69.088,98.425 122.428,98.425 122.428,101.219 121.412,102.235 116.205,102.235 115.877,101.907 ; 68.633,100.645 68.633,101.907 69.088,102.362 71.374,102.362 72.517,101.219 72.517,100.076 73.279,99.314 117.475,99.314 118.417,100.256 118.417,100.645 ; 68.633,115.845 68.633,113.612 69.977,112.268 117.475,112.268 118.417,113.21 118.417,115.845 ; 71.173,100.645 73.012,98.806 119.612,98.806 120.642,98.806 120.957,99.568 ; 71.173,115.845 71.173,113.739 71.882,113.03 117.221,113.03 117.221,116.84 117.475,117.094 120.269,117.094 120.957,116.406 120.957,115.845 ; 73.713,100.645 73.713,102.161 74.93,103.378 125.476,103.378 127.254,101.6 127.254,99.441 126.873,99.06 125.082,99.06 123.497,100.645 ; 76.253,100.645 76.253,102.034 77.089,102.87 125.349,102.87 126.037,102.182 126.037,100.645 ; 78.793,115.845 78.793,114.12 79.121,113.792 80.391,113.792 112.141,113.792 114.3,115.951 114.3,117.348 114.681,117.729 128.016,117.729 128.577,117.168 ; 115.498,101.14 ccw(c114.91,101.907) 115.877,101.907 ; 115.877,100.645 115.877,101.907 ; 116.256,101.14 cw(c116.844,101.907) 115.877,101.907 ; 117.669,99.508 ccw(c117.093,100.084) 117.844,100.402 ; 117.936,99.775 ccw(c117.468,100.243) 118.077,100.501 ; 117.977,115.404 cw(c116.913,114.341) 118.417,114.341 cw(c119.921,114.341) 118.858,115.404 ; 118.017,99.856 cw(c118.417,99.457) 118.417,100.022 ; 118.156,115.584 cw(c117.526,114.954) 118.417,114.954 cw(c119.308,114.954) 118.678,115.584 ; 120.3,117.063 cw(c119.478,116.241) 120.601,115.94 ; 120.611,116.752 cw(c119.969,116.11) 120.846,115.875 ; 120.647,100.105 cw(c120.338,99.568) 120.957,99.568 ; 120.957,100.645 120.957,99.568 ; 121.268,100.105 ccw(c121.577,99.568) 120.957,99.568 ; 123.497,100.022 cw(c123.497,98.518) 124.561,99.581 cw(c125.624,100.645) 124.12,100.645 ; 123.497,100.276 cw(c123.497,99.385) 124.127,100.015 cw(c124.757,100.645) 123.866,100.645 ; 125.597,101.086 ccw(c124.533,102.149) 126.037,102.149 ccw(c127.541,102.149) 126.478,101.086 ; 125.776,100.906 ccw(c125.146,101.536) 126.037,101.536 ccw(c126.928,101.536) 126.298,100.906 ; 128.18,116.325 ccw(c127.484,117.168) 128.577,117.168 ; 128.342,116.129 ccw(c127.93,116.628) 128.577,116.628 ccw(c129.224,116.628) 128.812,116.129 ; 128.577,115.845 128.577,117.168 ; 128.974,116.325 cw(c129.67,117.168) 128.577,117.168

## Polygon pours and split planes (outlines as drawn)
no net on Top Layer "Top Layer-No Net" (hatched 45Degree grid 0.508 track 0.203, pour order 1000): 150.876,120.523 150.876,87.503 43.688,87.503 43.688,120.523 150.876,120.523
no net on Bottom Layer "Top Layer-No Net" (hatched 45Degree grid 0.508 track 0.203, pour order 1001): 43.688,120.523 150.876,120.523 150.876,87.503 43.688,87.503 43.688,120.523

## Keep-outs
Keep-Out Layer:
  lines w0.254: 151.13,87.122 149.733,87.122 148.844,87.122 43.307,87.122 43.307,120.904 151.257,120.904 151.257,87.122

## Silkscreen, mask and mechanical layers (free items; w line width, h text height)
Top Overlay:
  text "GND" at 91.313,93.218 h0.76
  text "OE2" at 94.107,93.218 h0.76
  text "VCC" at 96.647,93.218 h0.76
  text "GND" at 99.06,93.218 h0.76
  text "DS" at 101.981,93.218 h0.76
  text "SHCP" at 103.632,93.218 h0.76
  text "STCP" at 107.061,93.218 h0.76
  text "OE1" at 86.233,93.091 h0.76
  text "GND" at 88.773,93.091 h0.76